# Altium PCB PCB.PcbDoc
Units mm, origin at the board's own origin, x right, y up, seen from the top; angles counter-clockwise.
Board outline 49.15 x 32.89 mm, 2 copper layers (Top Layer, Bottom Layer); 7 components, 7 nets, 17 pads, 2 vias.
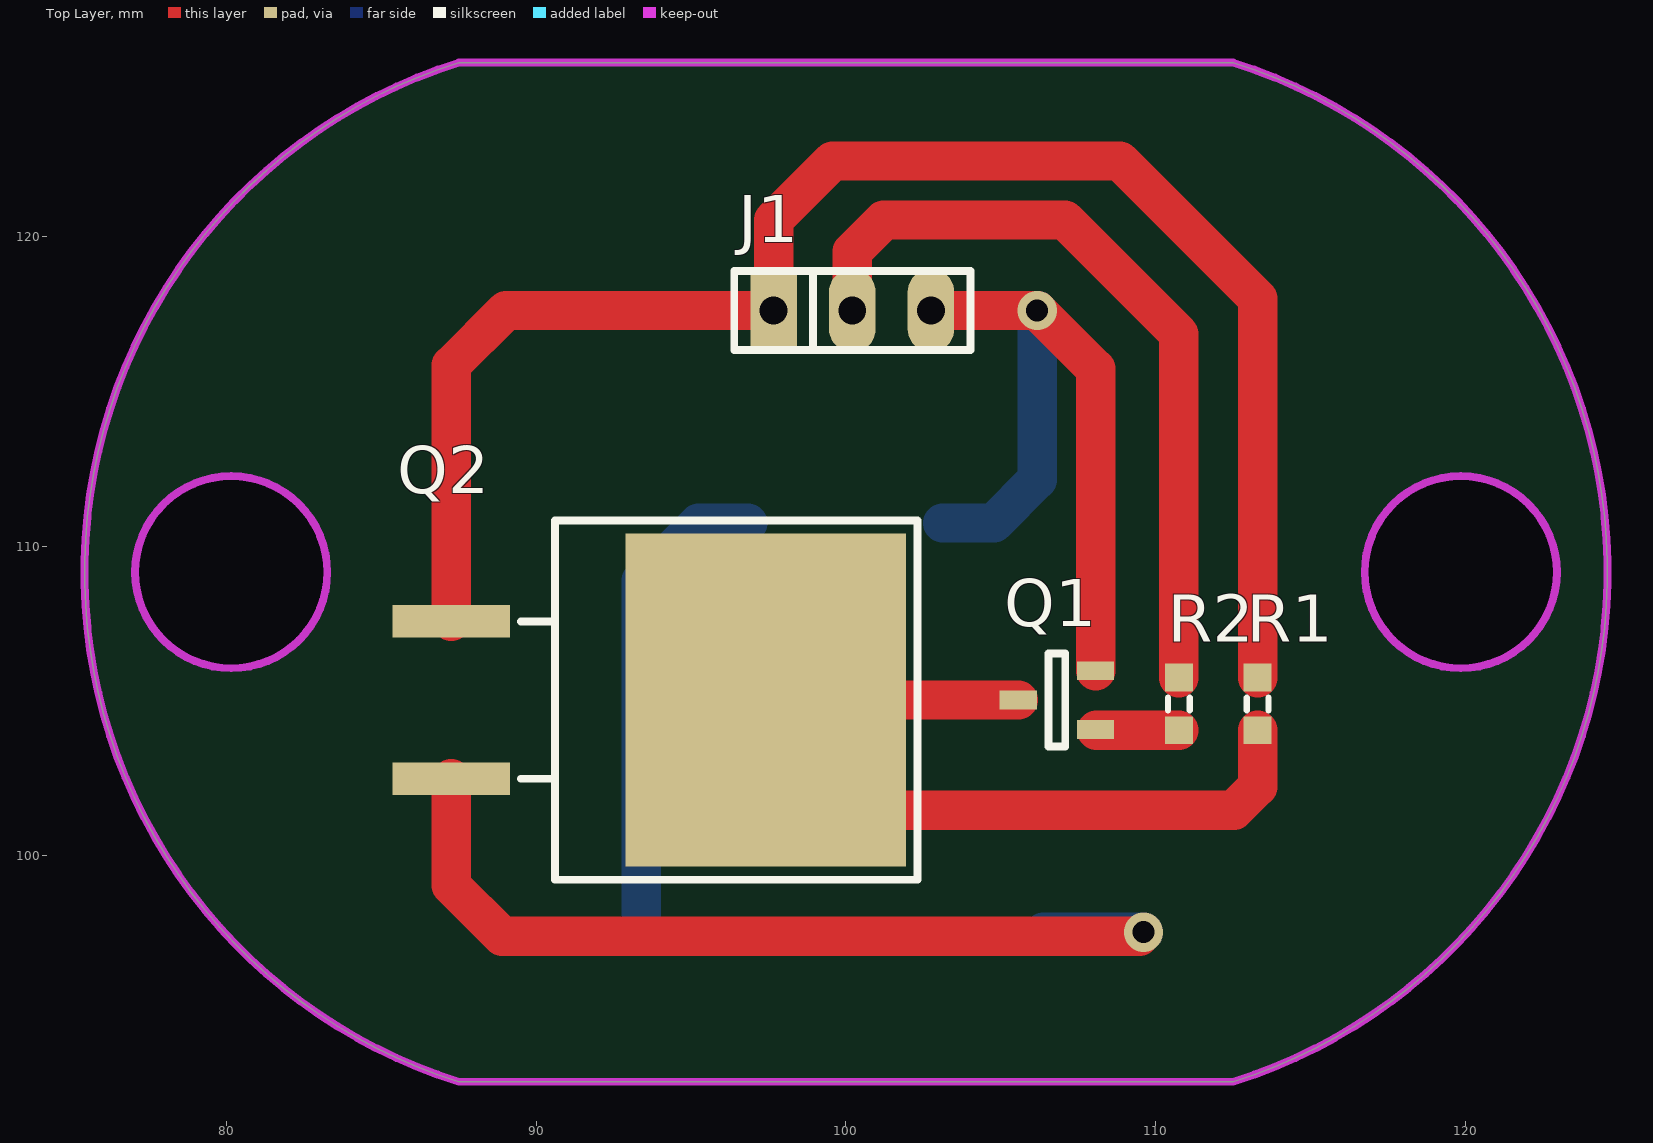
[diagram p0: Top Layer view]
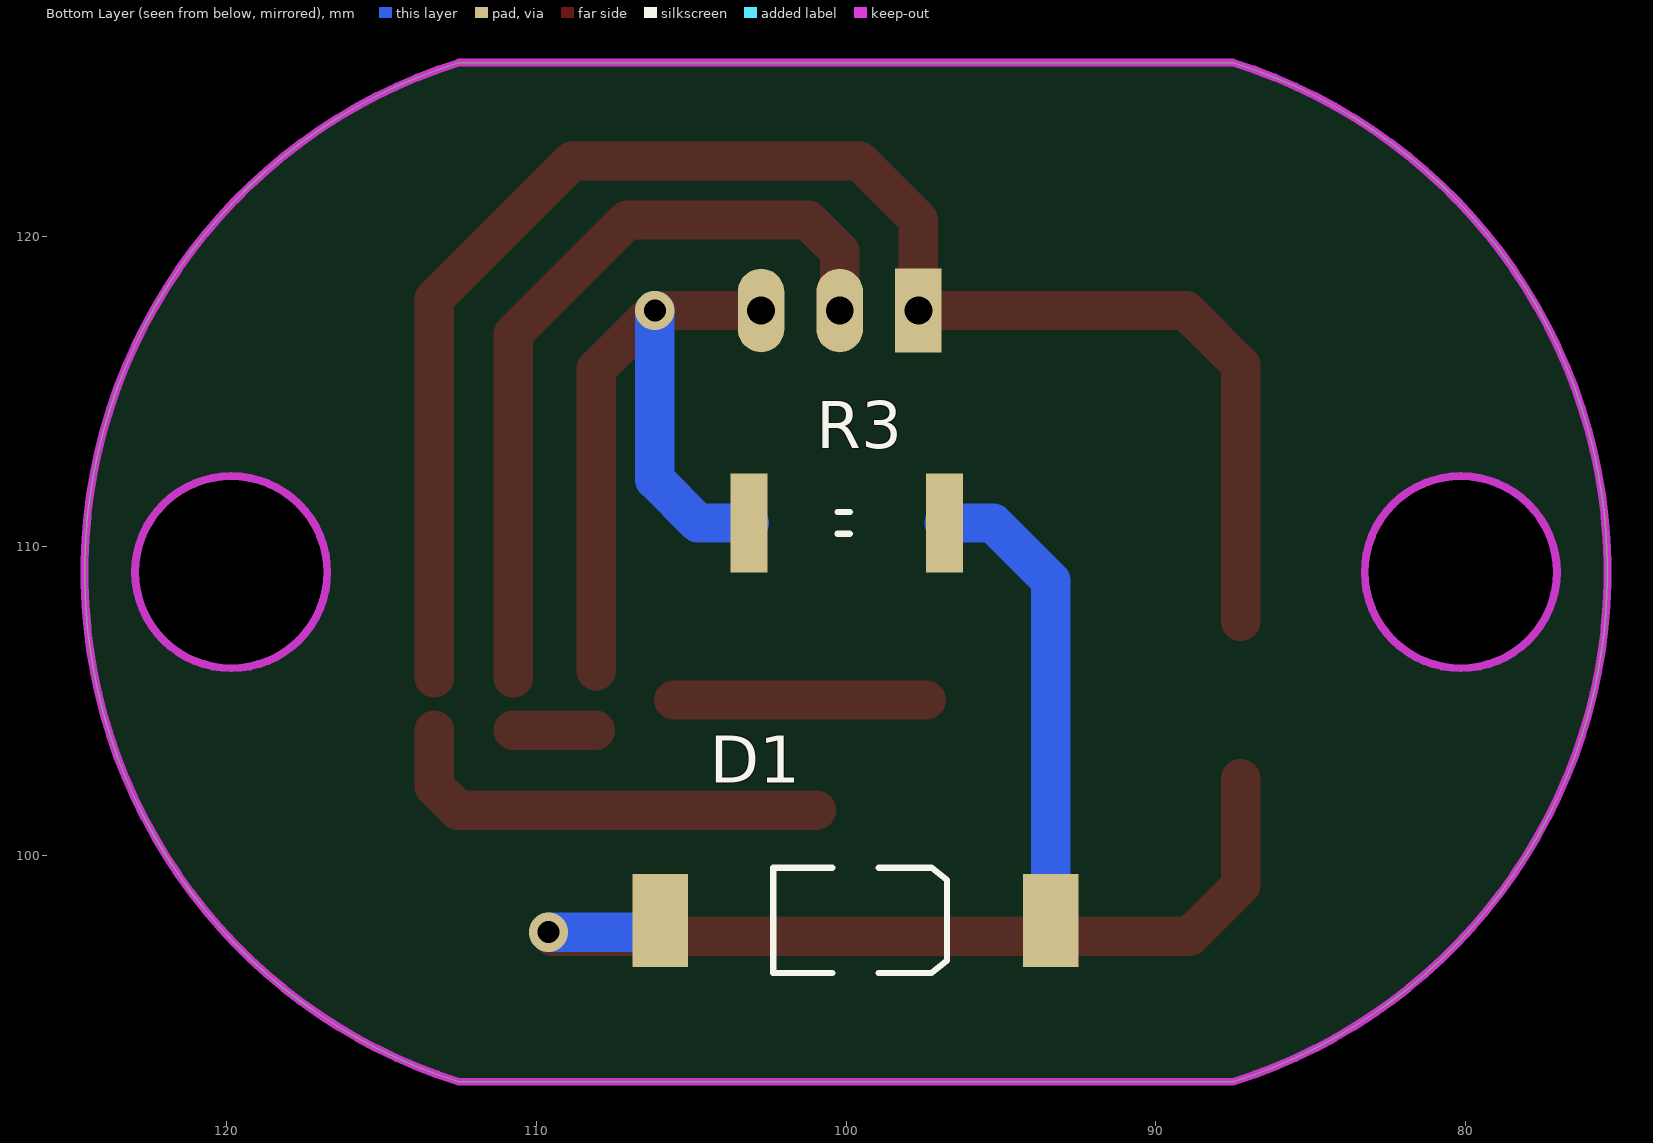
[diagram p1: Bottom Layer view, seen from below]

## Layer stack, top to bottom
Top Layer: signal copper 0.0356
Dielectric: dielectric 0.32, FR-4, Dk 4.8
Bottom Layer: signal copper 0.0356

## Board outline
87.5,92.71 cw(c92.657,109.156) 87.5,125.603 112.5,125.603 cw(c107.343,109.156) 112.5,92.71
cut-out: 80.157,106.056 cw(c80.157,109.156) 77.057,109.156 cw(c80.157,109.156) 80.157,112.256 cw(c80.157,109.156) 83.257,109.156 cw(c80.157,109.156)
cut-out: 116.743,109.156 ccw(c119.843,109.156) 119.843,106.056 ccw(c119.843,109.156) 122.943,109.156 ccw(c119.843,109.156) 119.843,112.256 ccw(c119.843,109.156)

## Design rules (kind name [scope] priority, off if disabled: settings)
Clearance [All] p1: gap=0.254
PolygonConnect [All] p1: connectstyle=Relief reliefconductorwidth=0.254 reliefentries=4 polygonreliefangle="90 Angle" airgapwidth=0.254
RoutingVias [All] p1: holewidth=0.711 width=1.27 viastyle="Through Hole" minholewidth=0.711 minwidth=1.27 maxholewidth=0.711 maxwidth=1.27
SolderMaskExpansion [All] p1: expansion=0.102
Width [All] p1: maxlimit=2.032 minlimit=0.254 preferedwidth=0.254 minimp=50.000000 maximp=50.000000 favimp=50.000000
28 further rules are at their usual default settings.

## Components (designator, comment, footprint, x,y, rotation, side; value= is the part's Value field where it differs from the comment)
D1 "LED3" 3.5X2.8X1.9 99.695,97.917 r180 bottom
J1 "CON3" SIP-3 97.663,117.602 r0 top
Q1 "NPN" SOT-23 106.807,105.029 r90 top
Q2 "IRF540" TO-263-2 97.409,105.029 r270 top
R1 "10k" J1-0603#1 113.284,104.902 r90 top
R2 "10k" J1-0603#1 110.744,104.902 r270 top
R3 "12" J1-0603#2 100.076,110.744 r180 bottom

## Footprints (in the part's own frame and the unit in brackets; to place one, negate y for a bottom-side part, rotate by r counter-clockwise, add the part's x,y. Pads: shape width x height; smd on the part's side, far side on the other; paste and mask are expansions set on the pad)
3.5X2.8X1.9 [mm] "SM LED; 2 C-Bend Leads; Body 3.5 x 2.8 x 1.9 mm, inc leads (LxWxH typ)"
  rect 1.8x3 smd: 1(-6.3,0) 2(6.3,0)
  silkscreen extent -2.65,-1.7 2.95,1.7
J1-0603#1 [mm] "Chip Resistor, Body 1.6x0.8mm, IPC High Density"
  rect 0.9x0.9 smd: 1(-0.85,0) 2(0.85,0)
  silkscreen extent -0.2,-0.35 0.2,0.35, body extent -0.85,-0.48 0.85,0.48, height 0.9
J1-0603#2 [mm] "Chip Resistor, Body 1.6x0.8mm, IPC High Density"
  rect 1.2x3.2 smd: 1(-3.05,0) 2(3.25,0)
  silkscreen extent -0.2,-0.35 0.2,0.35, body extent -0.85,-0.48 0.85,0.48, height 0.9
SIP-3 [mm]
  rect 1.5x2.7 hole 0.9: 1(0,0)
  oval 1.5x2.7 hole 0.9: 2(2.54,0) 3(5.08,0)
  silkscreen extent -1.27,-1.27 6.35,1.27
SOT-23 [mm] "SOT-23-3"
  rect 0.6x1.2 smd: 1(-0.95,-1.25) 2(0.95,-1.25) 3(0,1.25)
  silkscreen extent -1.5,-0.27 1.5,0.27, body extent -1.46,-1.28 1.46,1.27, height 0.99
TO-263-2 [mm] "TO-263, D2PAK, 2PIN"
  rect 1.05x3.8 smd: 1(-2.54,-10.15) 3(2.54,-10.15)
  rect 10.75x9.05 smd: 4(0,0)
  silkscreen extent -5.8,-7.9 5.8,4.9, body extent -5.08,-11.39 5.08,3.87, height 5.01

## Part data
D1: "Typical BLUE SiC LED"
J1: "SOCKET"
Q1: library part BC847, "NPN Bipolar Transistor"
Q2: "N-Channel MOSFET"
R1 R2 R3: library part Res3, "Resistor"

## Via types
v1: diameter 1.27, hole 0.711, Top Layer to Bottom Layer, 2 vias

## Nets (pads, with @x,y where several pads share a name; then routed paths per layer and width w, separated by ;. In a path a pad name is that pad's centre, name@x,y a point inside that pad or via, vN(x,y) a via of type N, cw(c..) or ccw(c..) an arc to the next point about the centre after c; other vN are vias at no path point)
GND: J1.3 Q1.2 R3.1 | length 24.9
  Top Layer w1.27: J1.3 v1(106.172,117.602) 108.057,115.717 Q1.2
  Bottom Layer w1.27: R3.1 104.775,110.744 106.172,112.141 v1(106.172,117.602)
NetD1_1: D1.1 Q2.3 | length 29.6
  Top Layer w1.27: Q2.3 87.259,99.05 88.9,97.409 v1@109.474,97.409
  Bottom Layer w1.27: D1.1@106.376,97.536 v1(109.601,97.536)
NetD1_2: D1.2 R3.2 | length 15.2
  Bottom Layer w1.27: D1.2 93.395,108.889 95.25,110.744 R3.2
NetJ1_2: J1.2 R2.1 | length 25.5
  Top Layer w1.27: J1.2 100.203,119.507 101.219,120.523 107.061,120.523 110.744,116.84 R2.1
NetQ1_1: Q1.1 R2.2 | length 2.7
  Top Layer w1.27: Q1.1@108.084,104.052 R2.2
NetQ1_3: Q1.3 Q2.4 R1.1 | length 22.6
  Top Layer w1.27: Q2.4 Q1.3 ; Q2.4@100.965,101.473 112.522,101.473 113.284,102.235 R1.1
VCC: J1.1 Q2.1 R1.2 | length 52.8
  Top Layer w1.27: Q2.1 87.259,115.834 89.027,117.602 J1.1 97.663,120.523 99.568,122.428 108.839,122.428 113.284,117.983 R1.2

## Keep-outs
Keep-Out Layer:
  circle w0.254: c119.843,109.156 r3.1
  circle w0.254: c80.157,109.156 r3.1
  lines w0.254: 87.5,92.71 cw(c92.657,109.156) 87.5,125.603 112.5,125.603 cw(c107.343,109.156) 112.5,92.71 87.5,92.71